# Altium PCB robot.pcbdoc (part 1 of 2)
Units mm, origin at the board's own origin, x right, y up, seen from the top; angles counter-clockwise.
Board outline 179.4 x 108.65 mm, 2 copper layers (Top Layer, Bottom Layer); 255 components, 246 nets, 775 pads, 189 vias.
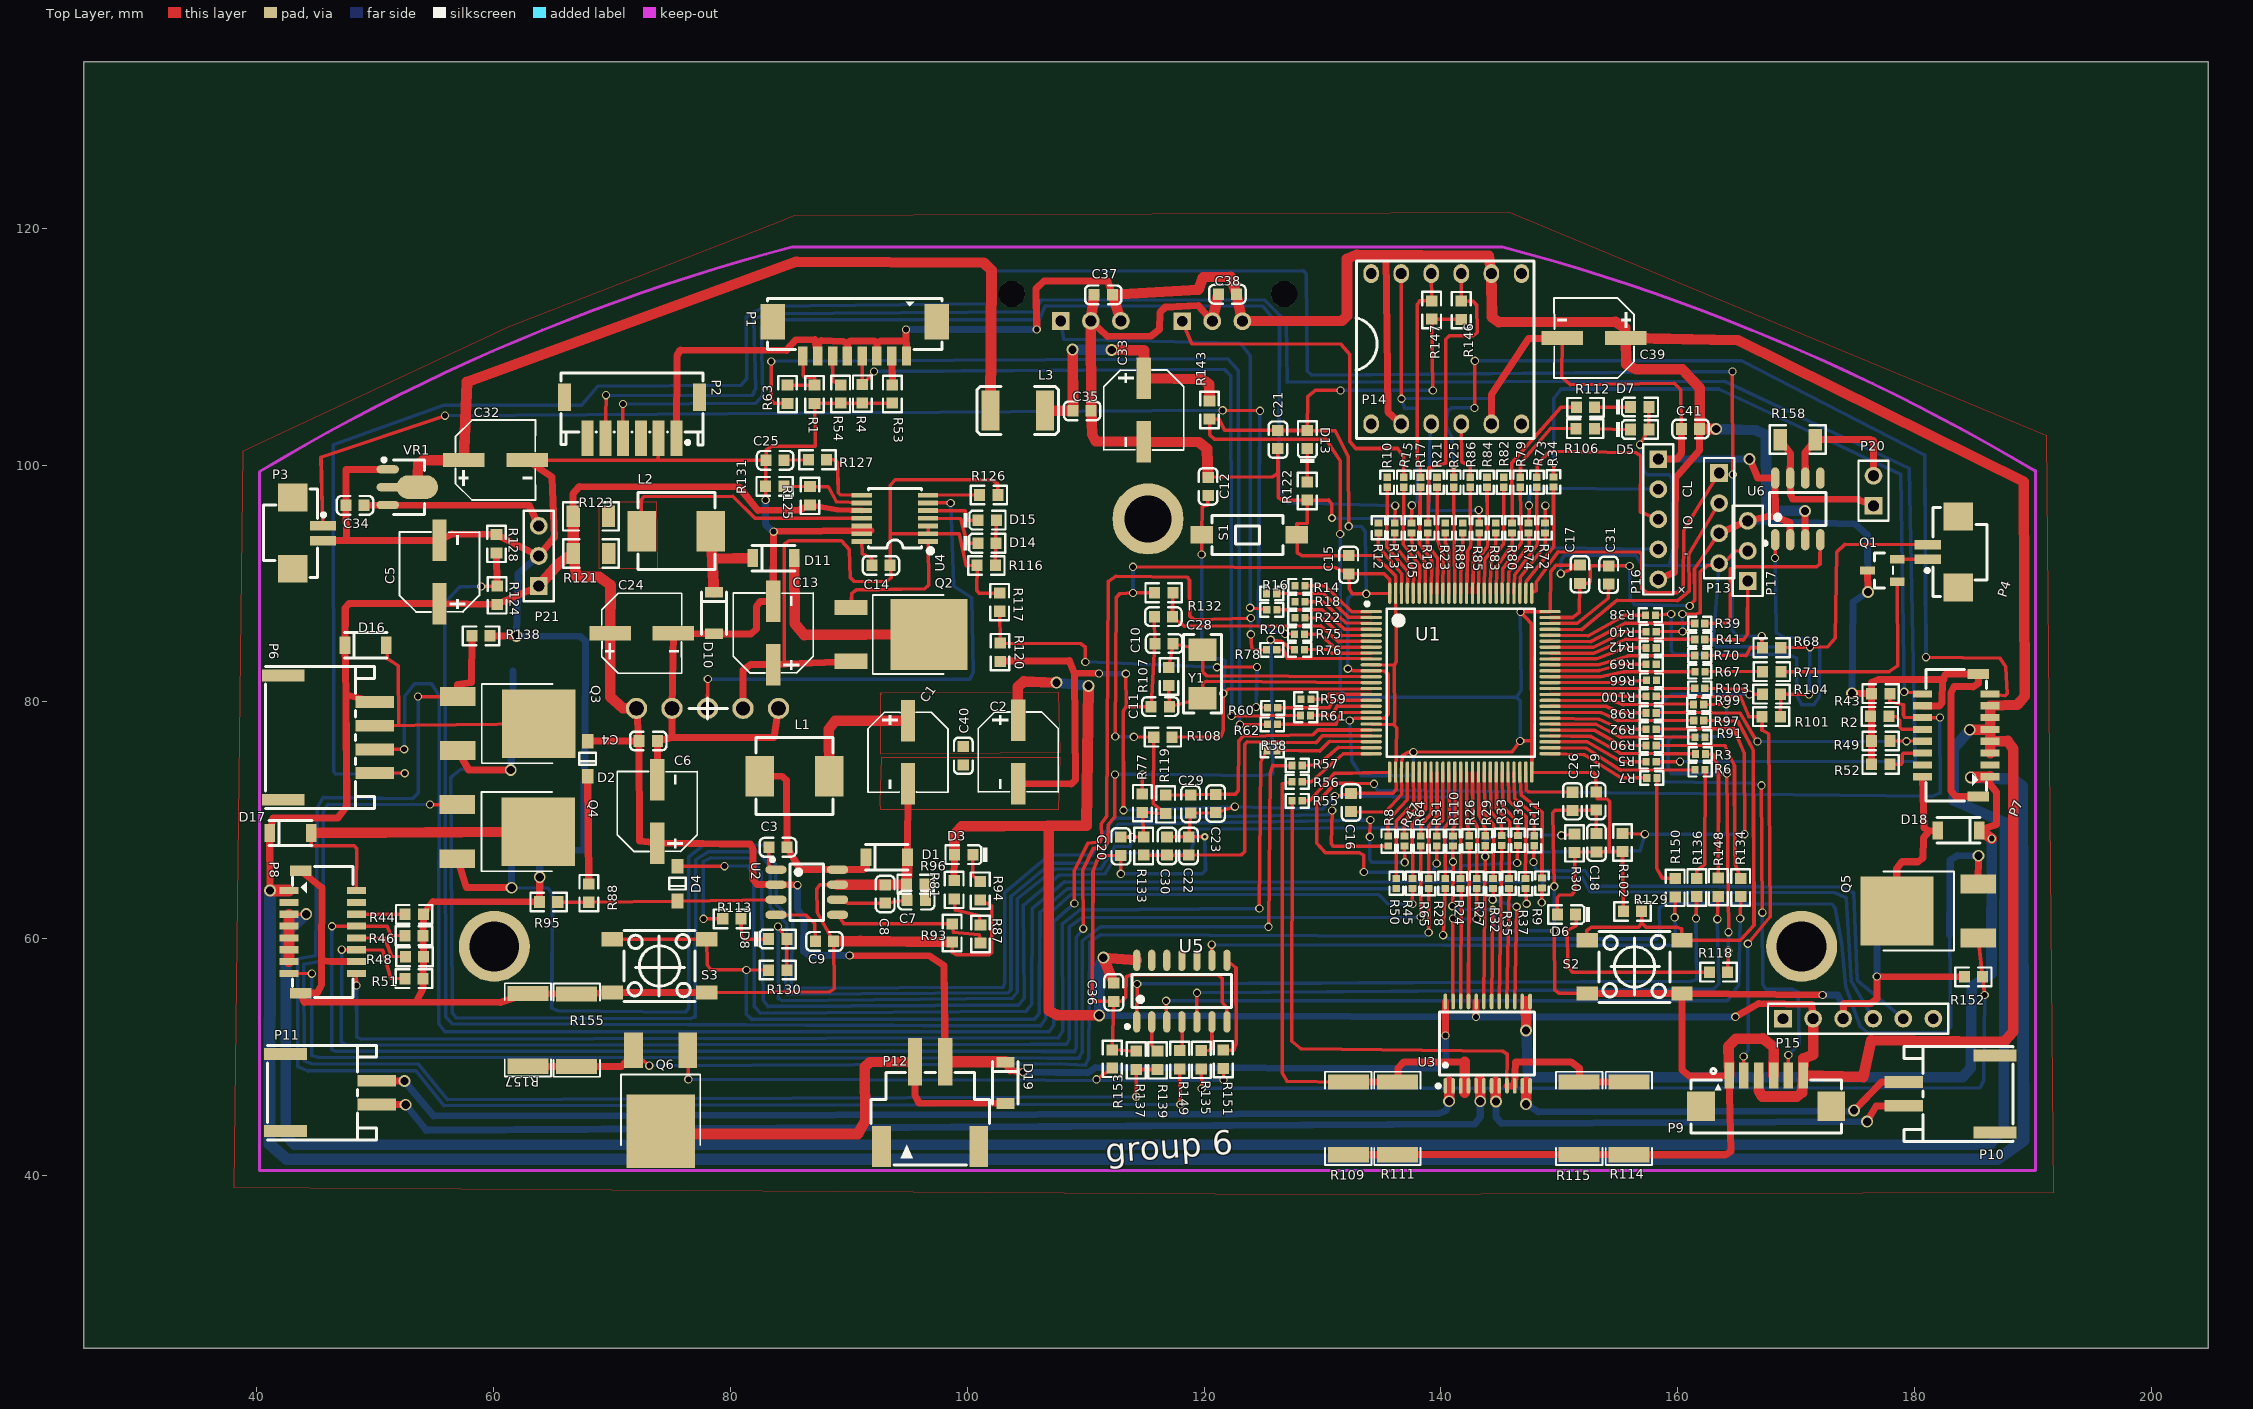
[diagram p0: Top Layer view]
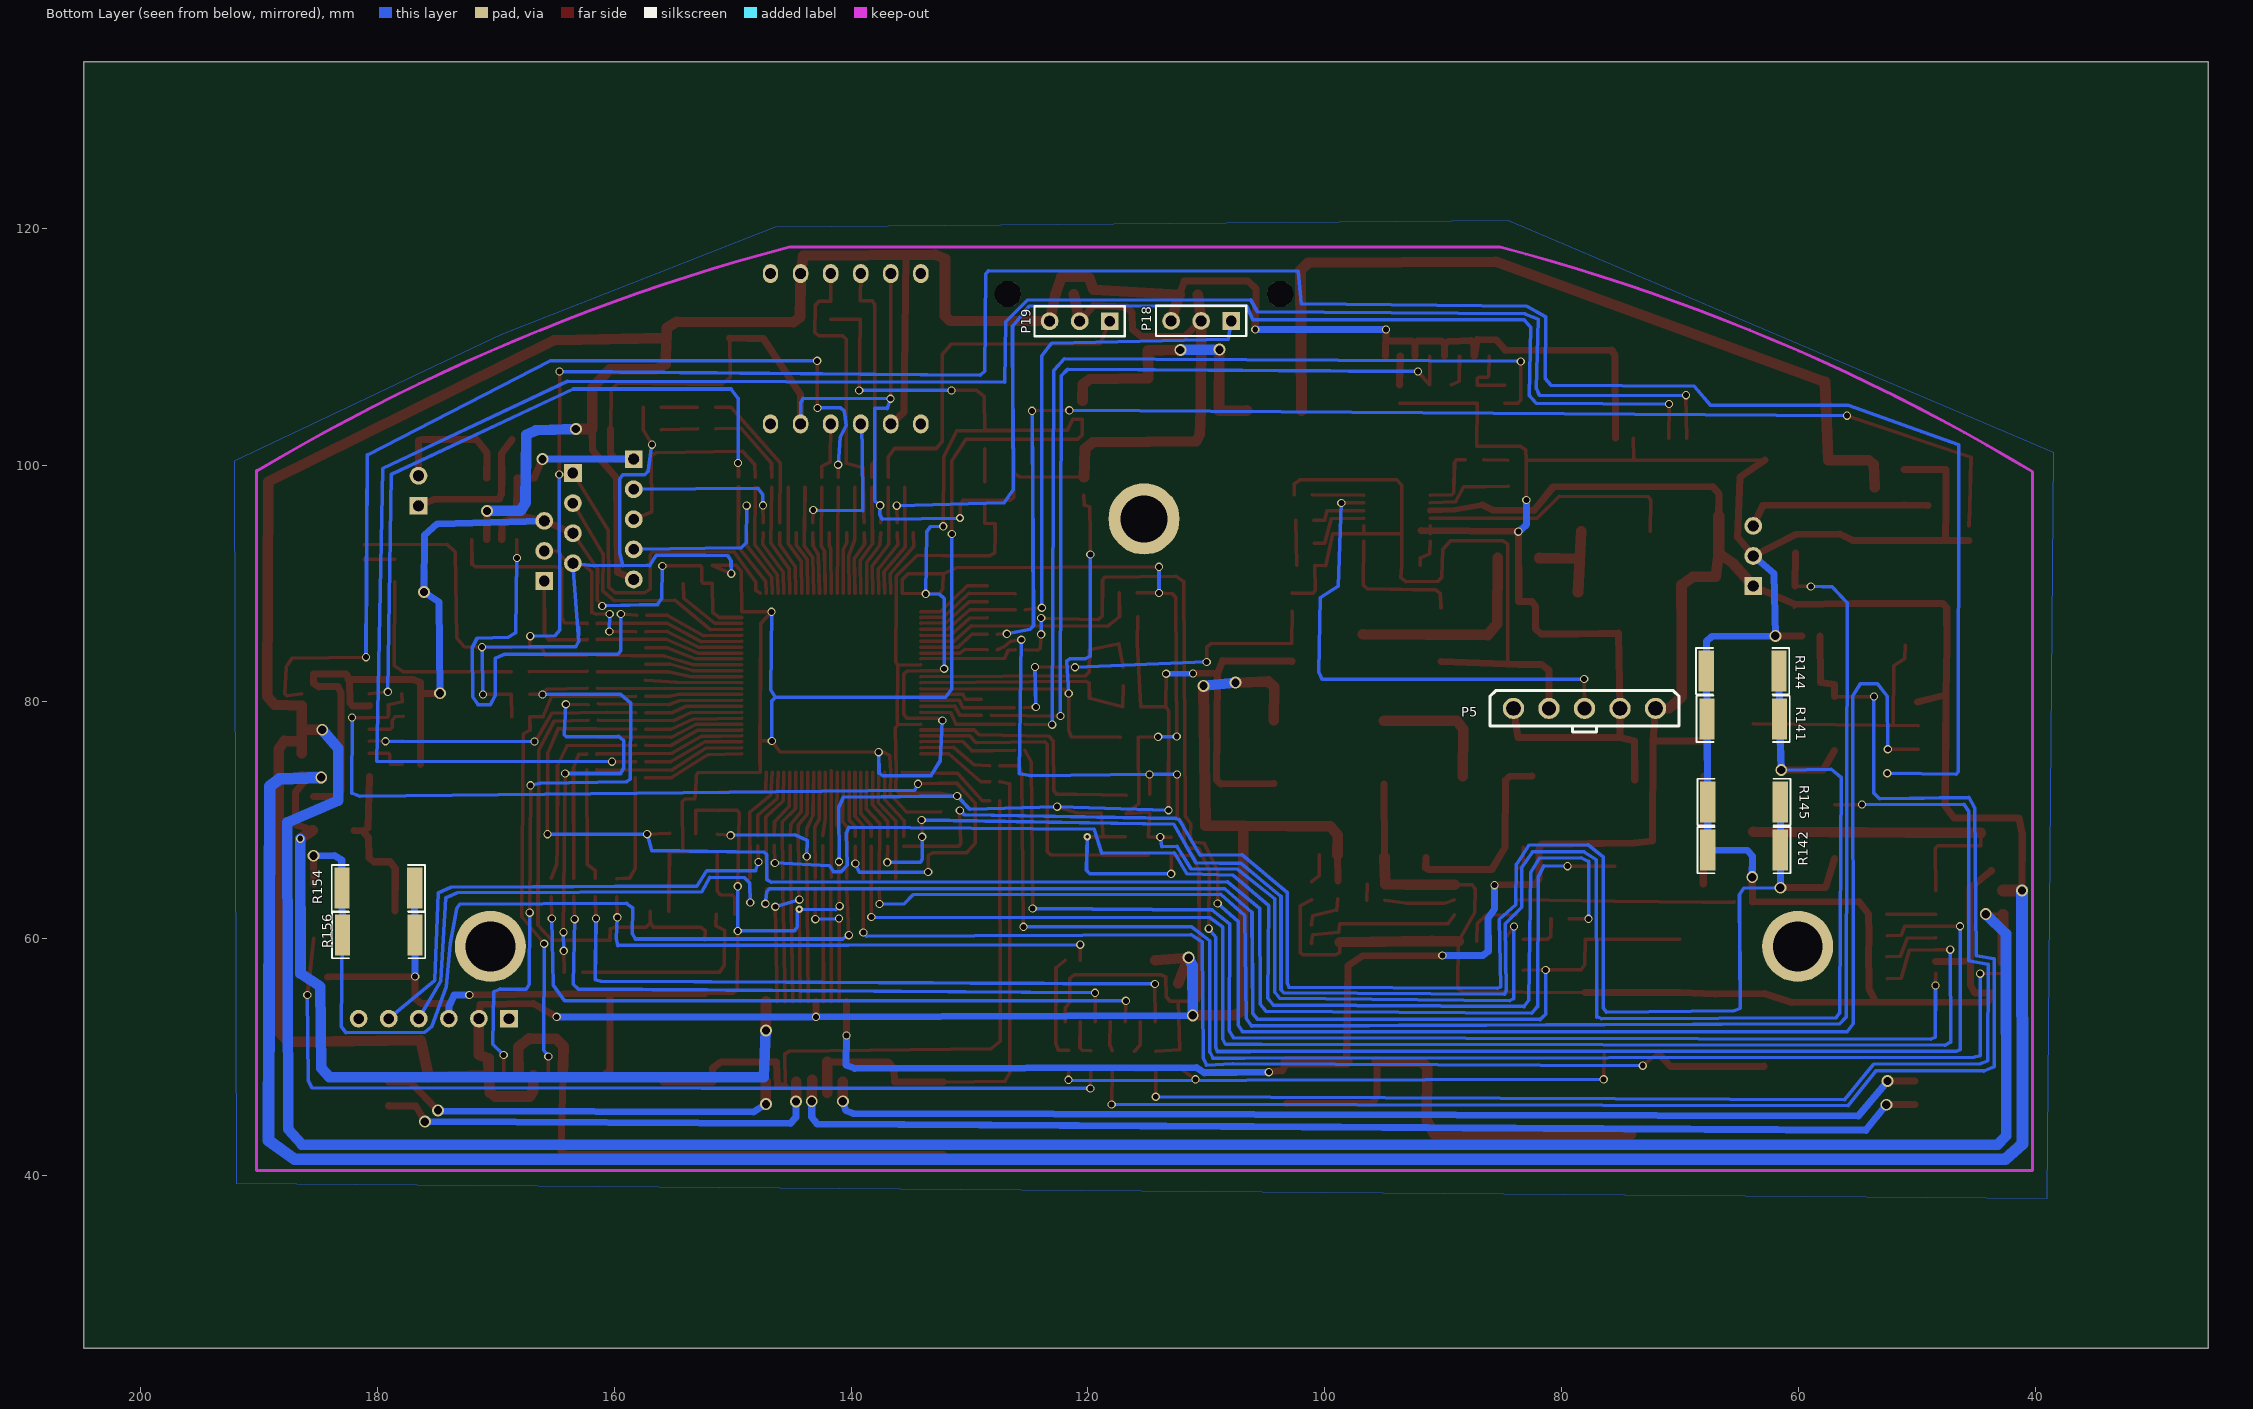
[diagram p1: Bottom Layer view, seen from below]

## Layer stack, top to bottom
Top Layer: signal copper (thickness not stored)
Dielectric: dielectric 0.32, FR-4, Dk 4.8
Bottom Layer: signal copper (thickness not stored)

## Board outline
204.8,25.4 25.4,25.4 25.4,134.05 204.8,134.05

## Components (designator, comment, footprint, x,y, rotation, side; value= is the part's Value field where it differs from the comment)
C1 "100uF" SMD6358 94.975,75.725 r270 top
C2 "100uF" SMD6358 104.291,75.747 r270 top
C3 "100nF (104) 10% 50V" 0603_C 84.019,67.72 r0 top
C4 "10nF (103) 10% 50V" 0603_C 73.067,76.698 r180 top
C5 "100uF" SMD6358 55.45,91 r90 top
C6 "100uF" SMD6358 73.842,70.773 r90 top
C7 "C" 0603_C 95.7,63.25 r180 top
C8 "39pF" 0603_C 93.075,63.775 r270 top
C9 "10nF (103) 10% 50V" 0603_C 87.944,59.77 r180 top
C10 "22pF 50V" 0603_C 116.625,84.925 r0 top
C11 "22pF 50V" 0603_C 116.3,79.6 r0 top
C12 "100nF (104) 10% 50V" 0603_C 120.342,98.198 r270 top
C13 "100uF" SMD6358 83.641,85.848 r90 top
C14 "100nF (104) 10% 50V" 0603_C 92.717,91.523 r0 top
C15 "100nF (104) 10% 50V" 0603_C 132.217,91.573 r270 top
C16 "100nF (104) 10% 50V" 0603_C 132.417,71.498 r270 top
C17 "100nF (104) 10% 50V" 0603_C 151.75,90.775 r90 top
C18 "100nF (104) 10% 50V" 0603_C 153.142,68.098 r270 top
C19 "100nF (104) 10% 50V" 0603_C 153.117,71.623 r90 top
C20 "100nF (104) 10% 50V" 0603_C 112.975,67.8 r90 top
C21 "100nF (104) 10% 50V" 0603_C 126.242,102.148 r90 top
C22 "10uF (106) 10% 10V" 0603_C 118.875,71.375 r90 top
C23 "100nF (104) 10% 50V" 0603_C 120.981,71.42 r90 top
C24 "100uF" SMD6358 72.541,85.772 r0 top
C25 "330nF (334) 10% 25V" 0603_C 83.775,100.4 r0 top
C26 "2.2uF  10% 10V" 0603_C 151.117,71.598 r90 top
C28 "100nF (104) 10% 50V" 0603_C 116.57,87.193 r0 top
C29 "10uF (106) 10% 10V" 0603_C 118.7,67.825 r270 top
C30 "100nF (104) 10% 50V" 0603_C 116.875,67.825 r270 top
C31 "2.2uF 10% 10V" 0603_C 154.175,90.725 r270 top
C32 "100uF" SMD6358 60.182,100.401 r0 top
C33 "100uF" SMD6358 114.891,104.623 r270 top
C34 "10nF (103) 10% 50V" 0603_C 48.3,96.6 r0 top
C35 "10nF (103) 10% 50V" 0603_C 109.7,104.575 r180 top
C36 "100nF (104) 10% 50V" 0603_C 112.375,55.475 r90 top
C37 "100nF (104) 10% 50V" 0603_C 111.49,114.371 r0 top
C38 "100nF (104) 10% 50V" 0603_C 121.975,114.425 r0 top
C39 "100uF" SMD6358 152.917,110.747 r180 top
C40 "100nF (104) 10% 50V" 0603_C 99.675,75.45 r90 top
C41 "100nF (104) 10% 50V" 0603_C 161.092,103.048 r0 top
D1 "B340A" LL-34 93.202,66.873 r0 top
D2 "B5819W  SL" SOD-123 67.95,75.2 r90 top
D3 "红灯 0603" 0603_LED_S1 99.7,67.1 r180 top
D4 "B5819W  SL" SOD-123 75.525,64.65 r90 top
D5 "绿灯 0603" 0603_LED_S1 156.8,103 r0 top
D6 "绿灯 0603" 0603_LED_S1 150.606,62.047 r180 top
D7 "绿灯 0603" 0603_LED_S1 156.8,104.9 r0 top
D8 "绿灯 0603" 0603_LED_S1 83.994,59.97 r0 top
D10 "B340A" LL-34 78.617,87.498 r270 top
D11 "B340A" LL-34 83.642,92.148 r0 top
D13 "红灯 0603" 0603_LED_S1 128.725,102.15 r90 top
D14 "红灯 0603" 0603_LED_S1 101.667,93.398 r0 top
D15 "绿灯 0603" 0603_LED_S1 101.697,95.348 r0 top
D16 "B340A" LL-34 49.2,84.775 r0 top
D17 "B340A" LL-34 42.85,68.925 r0 top
D18 "B340A" LL-34 183.717,69.148 r180 top
D19 "B340A" LL-34 103.225,47.825 r270 top
L1 "IHLP2525CZER100M01" IND-SMD 85.45,73.775 r0 top
L2 "IHLP2525CZER100M01" IND-SMD 75.392,94.373 r180 top
L3 "NLFC453232T-101K-PF" H-SMD-1836 104.45,104.625 r0 top
P1 "AFC12-S08DCC-00" CONN-SMD-8P-1.25 90.916,111.577 r180 top
P2 "ZH-6PWB" CONN-SMD-6P-1.5 71.55,105.075 r180 top
P3 "UK-1.25-2AWT" CONN-SMD-2P-1.25 43.225,94.25 r270 top
P4 "UK-1.25-2AWT" CONN-SMD-2P-1.25 183.492,92.648 r90 top
P5 "Header 5" IP3-5 78.067,79.448 r180 bottom
P6 "UK-2.0-4AWT" CONN-SMD_4P-P2.00_USAKRO_UK-2.0-4AWT 44.75,77.275 r270 top
P7 "A1001WR-S-2X08PD01" CONN-SMD_A1001WR-S-2X08PD01 183.636,77.161 r90 top
P8 "A1001WR-S-2X08PD01" CONN-SMD_A1001WR-S-2X08PD01 45.475,60.575 r270 top
P9 "UK-1.25-6AWT" CONN-SMD-6P-1.25 167.892,45.648 r0 top
P10 "UK-2.0-2AWT" CONN-SMD_2P-P2.00_USAKRO_UK-2.0-2AWT 183.525,46.825 r90 top
P11 "UK-2.0-2AWT" CONN-SMD_2P-P2.00_USAKRO_UK-2.0-2AWT 45.704,47.061 r270 top
P12 "HC-XH-2AWT" CONN-2.54-2PWT 97.075,44.75 r0 top
P13 "Header 4" HDR1X4 163.5,99.325 r270 top
P14 "JY901S" DIP254-127 134.112,103.473 r0 top
P15 "Header 6" HDR1X6 168.897,53.248 r0 top
P16 "Header 5" HDR1X5 158.367,100.498 r270 top
P17 "IR1" HDR1X3#1 165.917,90.208 r90 top
P18 "IR2" HDR1X3#2 107.902,112.173 r180 bottom
P19 "IR1" HDR1X3#2 118.162,112.148 r180 bottom
P20 "Header 2" HDR1X2 176.542,96.558 r90 top
P21 "LM7805" HDR1X3#3 63.817,89.783 r90 top
Q1 "SS8550 Y2" SOT-23(SOT-23-3) 177.292,91.098 r0 top
Q2 "NCE60P25" PMOS-SO-252 92.117,85.648 r0 top
Q3 "NCE6020AK" NMOS-T252-2 56.967,80.448 r0 top
Q4 "NCE6020AK" NMOS-T252-2 56.942,71.323 r0 top
Q5 "NCE6020AK" NMOS-T252-2 185.375,60.05 r180 top
Q6 "NCE6020AK" NMOS-T252-2 76.4,50.575 r270 top
R1 "1K ±1%" 0603_R 87.106,105.989 r270 top
R2 "51Ω (51R0) ±1%" 0603_R 177.075,78.775 r180 top
R3 "0Ω (0R0) ±1%" 0402_R 161.917,75.598 r0 top
R4 "1K ±1%" 0603_R 91.15,106.025 r270 top
R5 "0Ω (0R0) ±1%" 0402_R 157.767,74.95 r0 top
R6 "0Ω (0R0) ±1%" 0402_R 161.892,74.273 r0 top
R7 "0Ω (0R0) ±1%" 0402_R 157.817,73.578 r0 top
R8 "1K ±1%" 0402_R 135.561,68.248 r270 top
R9 "0Ω (0R0) ±1%" 0402_R 148.542,64.698 r270 top
R10 "0Ω (0R0) ±1%" 0402_R 135.467,98.548 r90 top
R11 "0Ω (0R0) ±1%" 0402_R 147.892,68.273 r270 top
R12 "0Ω (0R0) ±1%" 0402_R 134.742,94.698 r90 top
R13 "0Ω (0R0) ±1%" 0402_R 136.1,94.689 r90 top
R14 "0Ω (0R0) ±1%" 0402_R 128.092,89.798 r180 top
R15 "0Ω (0R0) ±1%" 0402_R 136.872,98.548 r90 top
R16 "0Ω (0R0) ±1%" 0402_R 125.717,89.148 r180 top
R17 "0Ω (0R0) ±1%" 0402_R 138.277,98.548 r90 top
R18 "0Ω (0R0) ±1%" 0402_R 128.092,88.448 r180 top
R19 "0Ω (0R0) ±1%" 0402_R 138.892,94.689 r90 top
R20 "0Ω (0R0) ±1%" 0402_R 125.725,87.775 r180 top
R21 "0Ω (0R0) ±1%" 0402_R 139.682,98.548 r90 top
R22 "0Ω (0R0) ±1%" 0402_R 128.092,87.098 r180 top
R23 "0Ω (0R0) ±1%" 0402_R 140.367,94.689 r90 top
R24 "0Ω (0R0) ±1%" 0402_R 141.667,64.648 r270 top
R25 "0Ω (0R0) ±1%" 0402_R 141.087,98.548 r90 top
R26 "0Ω (0R0) ±1%" 0402_R 142.389,68.273 r270 top
R27 "0Ω (0R0) ±1%" 0402_R 143.041,64.673 r270 top
R28 "1K ±1%" 0402_R 140.37,64.673 r270 top
R29 "0Ω (0R0) ±1%" 0402_R 143.755,68.273 r270 top
R30 "100KΩ (1003) ±1%" 0603_R 151.292,68.053 r270 top
R31 "1K ±1%" 0402_R 139.658,68.248 r270 top
R32 "0Ω (0R0) ±1%" 0402_R 144.411,64.648 r270 top
R33 "0Ω (0R0) ±1%" 0402_R 145.136,68.298 r270 top
R34 "0Ω (0R0) ±1%" 0402_R 149.517,98.573 r90 top
R35 "0Ω (0R0) ±1%" 0402_R 145.761,64.673 r270 top
R36 "0Ω (0R0) ±1%" 0402_R 146.514,68.298 r270 top
R37 "0Ω (0R0) ±1%" 0402_R 147.142,64.648 r270 top
R38 "0Ω (0R0) ±1%" 0402_R 157.7,87.325 r0 top
R39 "0Ω (0R0) ±1%" 0402_R 161.867,86.62 r0 top
R40 "0Ω (0R0) ±1%" 0402_R 157.767,85.93 r0 top
R41 "0Ω (0R0) ±1%" 0402_R 161.867,85.27 r0 top
R42 "0Ω (0R0) ±1%" 0402_R 157.767,84.558 r0 top
R43 "5.1K ±1%" 0603_R 177.15,80.7 r0 top
R44 "51Ω (51R0) ±1%" 0603_R 53.3,62.05 r0 top
R45 "1K ±1%" 0402_R 137.614,64.673 r270 top
R46 "1K ±1%" 0603_R 53.275,60.25 r0 top
R47 "1K ±1%" 0402_R 136.927,68.248 r270 top
R48 "51Ω (51R0) ±1%" 0603_R 53.325,58.475 r180 top
R49 "1K ±1%" 0603_R 177.15,76.7 r0 top
R50 "0Ω (0R0) ±1%" 0402_R 136.236,64.673 r270 top
R51 "5.1K ±1%" 0603_R 53.275,56.625 r0 top
R52 "51Ω (51R0) ±1%" 0603_R 177.15,74.725 r0 top
R53 "51Ω (51R0) ±1%" 0603_R 93.675,106 r270 top
R54 "51Ω (51R0) ±1%" 0603_R 89.317,105.998 r270 top
R55 "1K ±1%" 0402_R 127.867,71.648 r180 top
R56 "1K ±1%" 0402_R 127.867,73.248 r180 top
R57 "0Ω (0R0) ±1%" 0402_R 127.867,74.623 r180 top
R58 "0Ω (0R0) ±1%" 0402_R 125.75,75.9 r180 top
R59 "0Ω (0R0) ±1%" 0402_R 128.608,80.227 r180 top
R60 "1K ±1%" 0402_R 125.8,79.5 r180 top
R61 "1K±1%" 0402_R 128.583,78.852 r180 top
R62 "0Ω (0R0) ±1%" 0402_R 125.775,78.1 r180 top
R63 "1KΩ  ±1%" 0603_R 84.82,105.989 r90 top
R64 "1K ±1%" 0402_R 138.292,68.248 r270 top
R65 "1K ±1%" 0402_R 138.967,64.648 r270 top
R66 "0Ω (0R0) ±1%" 0402_R 157.792,81.823 r0 top
R67 "0Ω (0R0) ±1%" 0402_R 161.875,82.55 r0 top
R68 "100KΩ (1003) ±1%" 0603_R 167.937,84.573 r0 top
R69 "0Ω (0R0) ±1%" 0402_R 157.767,83.185 r0 top
R70 "0Ω (0R0) ±1%" 0402_R 161.867,83.92 r0 top
R71 "1K ±1%" 0603_R 167.95,82.55 r0 top
R72 "0Ω (0R0) ±1%" 0402_R 148.8,94.689 r90 top
R73 "0Ω (0R0) ±1%" 0402_R 148.112,98.548 r90 top
R74 "0Ω (0R0) ±1%" 0402_R 147.408,94.689 r90 top
R75 "0Ω (0R0) ±1%" 0402_R 128.067,85.723 r180 top
R76 "0Ω (0R0) ±1%" 0402_R 128.067,84.398 r180 top
R77 "100KΩ (1003) ±1%" 0603_R 114.792,71.445 r270 top
R78 "0Ω (0R0) ±1%" 0402_R 125.714,84.399 r180 top
R79 "0Ω (0R0) ±1%" 0402_R 146.707,98.548 r90 top
R80 "0Ω (0R0) ±1%" 0402_R 146.017,94.689 r90 top
R81 "0Ω (0R0) ±1%" 0603_R 98.9,64.125 r90 top
R82 "0Ω (0R0) ±1%" 0402_R 145.302,98.548 r90 top
R83 "0Ω (0R0) ±1%" 0402_R 144.625,94.689 r90 top
R84 "0Ω (0R0) ±1%" 0402_R 143.897,98.548 r90 top
R85 "0Ω (0R0) ±1%" 0402_R 143.233,94.689 r90 top
R86 "0Ω (0R0) ±1%" 0402_R 142.492,98.548 r90 top
R87 "10.2KΩ (1002) ±1%" 0603_R 101.125,60.4 r90 top
R88 "330KΩ  ±1%" 0603_R 68.042,63.848 r90 top
R89 "0Ω (0R0) ±1%" 0402_R 141.842,94.689 r90 top
R90 "0Ω (0R0) ±1%" 0402_R 157.767,76.323 r0 top
R91 "0Ω (0R0) ±1%" 0402_R 161.875,77.025 r0 top
R92 "0Ω (0R0) ±1%" 0402_R 157.767,77.695 r0 top
R93 "1.91KΩ (1002) ±1%" 0603_R 98.725,60.475 r90 top
R94 "10KΩ (1002) ±1%" 0603_R 101.1,64.05 r90 top
R95 "68KΩ" 0603_R 64.65,63.1 r0 top
R96 "50KΩ (1002) ±1%" 0603_R 95.65,64.6 r0 top
R97 "0Ω (0R0) ±1%" 0402_R 161.782,78.435 r0 top
R98 "0Ω (0R0) ±1%" 0402_R 157.767,79.068 r0 top
R99 "0Ω (0R0) ±1%" 0402_R 161.775,79.775 r0 top
R100 "0Ω (0R0) ±1%" 0402_R 157.767,80.473 r0 top
R101 "100KΩ (1003) ±1%" 0603_R 167.9,78.75 r0 top
R102 "31KΩ ±1%" 0603_R 155.342,68.123 r90 top
R103 "0Ω (0R0) ±1%" 0402_R 161.867,81.148 r0 top
R104 "100KΩ (1003) ±1%" 0603_R 167.925,80.65 r0 top
R105 "10KΩ (1002) ±1%" 0402_R 137.517,94.689 r270 top
R106 "5.1KΩ ±1%" 0603_R 152.192,103.073 r0 top
R107 "1MΩ (1004) ±1%" 0603_R 117.037,82.143 r90 top
R108 "10KΩ (1002) ±1%" 0603_R 116.525,77.025 r180 top
R109 "0.1Ω (R100) ±1%" R2512#1 132.031,44.917 r90 top
R110 "10KΩ (1002) ±1%" 0402_R 141.023,68.248 r90 top
R111 "0.1Ω (R100) ±1%" R2512#1 136.181,44.917 r90 top
R112 "5.1KΩ  ±1%" 0603_R 152.217,104.878 r0 top
R113 "2KΩ (2002) ±1%" 0603_R 80.125,61.675 r0 top
R114 "0.1Ω (R100) ±1%" R2512#1 155.731,44.917 r90 top
R115 "0.1Ω (R100) ±1%" R2512#1 151.531,44.928 r90 top
R116 "4.7KΩ (4701) ±1%" 0603_R 101.617,91.523 r180 top
R117 "20K" 0603_R 102.742,88.423 r270 top
R118 "2KΩ (2002) ±1%" 0603_R 163.45,57.175 r180 top
R119 "1Ω  ±1%" 0603_R 116.756,71.345 r270 top
R120 "3K" 0603_R 102.775,84.2 r270 top
R121 "0.4Ω (1000) ±1%" 1206_R 68.225,92.525 r180 top
R122 "5.1KΩ ±1%" 0603_R 128.717,97.803 r90 top
R123 "0.4Ω (1000) ±1%" 1206_R 68.216,95.672 r180 top
R124 "20k" 0603_R 60.3,89 r270 top
R125 "120Ω (1200) ±1%" 0603_R 86.725,97.4 r90 top
R126 "120Ω (1200) ±1%" 0603_R 101.825,97.475 r180 top
R127 "120Ω (1200) ±1%" 0603_R 87.35,100.45 r0 top
R128 "3K" 0603_R 60.25,93.35 r270 top
R129 "10KΩ (1002) ±1%" 0603_R 156.194,62.301 r180 top
R130 "10KΩ (1002) ±1%" 0603_R 84,57.35 r0 top
R131 "39.3K ±1%" 0603_R 83.742,98.198 r180 top
R132 "10Ω  ±1%" 0603_R 116.59,89.218 r180 top
R133 "1Ω  ±1%" 0603_R 114.9,67.825 r90 top
R134 "1KΩ (1001) ±1%" 0603_R 165.317,64.323 r270 top
R135 "1KΩ (1001) ±1%" 0603_R 117.95,49.775 r270 top
R136 "1KΩ (1001) ±1%" 0603_R 161.617,64.323 r270 top
R137 "1KΩ (1001) ±1%" 0603_R 116.075,49.725 r270 top
R138 "100KΩ (1003) ±1%" 0603_R 58.942,85.573 r180 top
R139 "100KΩ (1003) ±1%" 0603_R 114.275,49.725 r270 top
R141 "0.1Ω (R100) ±1%" R2512#2 64.567,78.723 r0 bottom
R142 "0.1Ω (R100) ±1%" R2512#2 64.5,67.635 r0 bottom
R143 "0Ω (0R0) ±1%" 0603_R 120.467,104.648 r90 top
R144 "0.1Ω (R100) ±1%" R2512#2 64.617,82.748 r0 bottom
R145 "0.1Ω (R100) ±1%" R2512#2 64.5,71.699 r0 bottom
R146 "10KΩ (1002) ±1%" 0603_R 141.725,113.075 r270 top
R147 "10KΩ (1002) ±1%" 0603_R 139.225,113.1 r270 top
R148 "1KΩ (1001) ±1%" 0603_R 163.442,64.348 r270 top
R149 "1KΩ (1001) ±1%" 0603_R 119.775,49.775 r270 top
R150 "1KΩ (1001) ±1%" 0603_R 159.792,64.298 r270 top
R151 "1KΩ (1001) ±1%" 0603_R 121.625,49.825 r270 top
R152 "100KΩ (1003) ±1%" 0603_R 184.975,56.775 r0 top
R153 "100KΩ (1003) ±1%" 0603_R 112.25,49.85 r270 top
R154 "0.1Ω (R100) ±1%" R2512#2 180.025,64.122 r180 bottom
R155 "0.1Ω (R100) ±1%" R2512#1 67.175,52.175 r270 top
R156 "0.1Ω (R100) ±1%" R2512#2 180,60.147 r180 bottom
R157 "0.1Ω (R100) ±1%" R2512#1 63.05,52.2 r270 top
R158 "120Ω" 1206_R 170.142,102.148 r0 top
S1 "SW-PB" SW-SMD-L1.6-W3.3 119.725,94.056 r0 top
S2 "DTSM-65Y-V-T/R" SW-SMD_4P-L6.0-W6.0-P4.50-LS8.6 156.366,57.622 r180 top
S3 "DTSM-65Y-V-T/R" SW-SMD_4P-L6.0-W6.0-P4.50-LS8.6 74.017,57.698 r180 top
U1 "STM32F407VET6" LQFP-100_14X14X05P 141.675,81.625 r0 top
U2 "TPS54331DR" SOIC-8_150MIL 86.45,63.925 r270 top
U3 "TB6612FNG" SSOP-24 143.748,51.379 r0 top
U4 "SLM6900" TSSOP145065 93.9,95.475 r90 top
U5 "74HC14D" SOIC-14_150MIL 118.125,55.575 r0 top
U6 "CAN/TJA1050T/CM" SOIC-8_150MIL 170.142,96.298 r0 top
VR1 "AMS1117-3.3" "SOT89 - DUPLICATE" 53.578,98.369 r270 top
Y1 "8MHz ±20ppm 20pF" SMD-5032_2P 119.872,82.367 r90 top

## Footprints (in the part's own frame and the unit in brackets; to place one, negate y for a bottom-side part, rotate by r counter-clockwise, add the part's x,y. Pads: shape width x height; smd on the part's side, far side on the other; paste and mask are expansions set on the pad)
0402_R [mm]
  rect 0.6x0.65 smd paste+0 mask+0.051: 1(-0.425,0) 2(0.425,0)
  silkscreen extent -0.98,-0.58 0.98,0.58
0603_C [mm]
  rect 0.93x0.98 smd paste+0 mask+0.051: 1(-0.77,0) 2(0.77,0)
  silkscreen extent -1.53,-0.79 1.53,0.79
0603_LED_S1 [mm]
  rect 0.93x0.98 smd paste+0 mask+0.051: A(0.77,0) K(-0.77,0)
  silkscreen extent -1.98,-0.79 1.54,0.79
0603_R [mm]
  rect 0.93x0.98 smd paste+0 mask+0.051: 1(-0.77,0) 2(0.77,0)
  silkscreen extent -1.53,-0.79 1.53,0.79
1206_R [mm]
  rect 1.13x1.8 smd paste+0 mask+0.051: 1(-1.49,0) 2(1.49,0)
  silkscreen extent -2.36,-1.2 2.36,1.2
CONN-2.54-2PWT [mil]
  rect 47.2x157.5 smd paste+0 mask+2: 1(-57.92,191.13) 2(42.08,191.13)
  rect 63x137.8 smd paste+0 mask+2: 3(153.48,-90.47) 4(-169.32,-90.47)
  silkscreen extent -205,-151 189,156
CONN-SMD-2P-1.25 [mm]
  rect 0.8x2.2 smd paste+0 mask+0.051: 1(-0.622,2.371) 2(0.628,2.371)
  rect 2.35x2.5 smd paste+0 mask+0.051: 3(-3.002,-0.199) 4(3.008,-0.199)
  silkscreen extent -3.75,-2.64 3.75,2.57
CONN-SMD-6P-1.5 [mm]
  rect 1x3 smd paste+0 mask+0.051: 1(-3.89,2.794) 2(-2.39,2.794) 3(-0.89,2.794) 4(0.61,2.794) 5(2.11,2.794) 6(3.61,2.794)
  rect 1.1x2.3 smd paste+0 mask+0.051: 7(5.56,-0.656) 8(-5.84,-0.656)
  silkscreen extent -6.14,-2.71 5.86,3.36
CONN-SMD-6P-1.25 [mil]
  rect 31.5x86.6 smd paste+0 mask+2: 1(-139.46,110.21) 2(-90.26,110.21) 3(-41.06,110.21) 4(8.14,110.21) 5(57.34,110.21) 6(106.54,110.21)
  rect 92.5x98.4 smd paste+0 mask+2: 7(-233.16,7.81) 8(200.24,7.81)
  silkscreen extent -266,-81 234,133
CONN-SMD-8P-1.25 [mil]
  rect 82.7x118.1 smd paste+0 mask+2: 0(-256.2,-20.88) 0(288.99,-20.88)
  rect 31.5x63 smd paste+0 mask+2: 1(-155.8,93.32) 2(-106.61,93.32) 3(-57.4,93.32) 4(-8.2,93.32) 5(40.99,93.32) 6(90.2,93.32) 7(139.39,93.32) 8(188.6,93.32)
  silkscreen extent -274,-99 306,71
CONN-SMD_2P-P2.00_USAKRO_UK-2.0-2AWT [mm]
  rect 1x3.25 smd paste+0 mask+0.051: 1(-0.937,4.445) 2(1.063,4.445)
  rect 1x3.6 smd paste+0 mask+0.051: 3(-3.187,-3.28) 4(3.313,-3.28)
  silkscreen extent -3.94,-4.78 4.06,4.42
CONN-SMD_4P-P2.00_USAKRO_UK-2.0-4AWT [mm]
  rect 1x3.25 smd paste+0 mask+0.051: 1(-2.715,5.207) 2(-0.715,5.207) 3(1.285,5.207) 4(3.285,5.207)
  rect 1x3.6 smd paste+0 mask+0.051: 5(-4.965,-2.518) 6(5.535,-2.518)
  silkscreen extent -5.72,-4.02 6.29,5.18
CONN-SMD_A1001WR-S-2X08PD01 [mil]
  rect 23.6x63 smd paste+0 mask+2: 1(-137.36,-108.49) 2(-137.36,115.9) 3(-97.95,-108.49) 4(-97.95,115.9) 5(-58.66,-108.49) 6(-58.66,115.9) 7(-19.26,-108.49) 8(-19.26,115.9) 9(20.14,-108.49) 10(20.14,115.9) 11(59.55,-108.49) 12(59.55,115.9) 13(98.84,-108.49) 14(98.84,115.9) 15(138.24,-108.49) 16(138.24,115.9)
  rect 33.5x70.9 smd paste+0 mask+2: 17(-203.26,-69.1) 18(204.14,-69.1)
  silkscreen extent -218,-97 219,104
DIP254-127 [mm]
  oval 1.3x1.6 hole 0.9 paste+0 mask+0.051: 1(0,0) 3(5.08,0) 4(7.62,0) 6(12.7,0) 7(12.7,12.7) 9(7.62,12.7) 10(5.08,12.7) 12(0,12.7)
  oval 1.3x1.6 hole 0.9 slot 0.905 at 90 deg paste+0 mask+0.051: 2(2.54,0) 5(10.16,0) 8(10.16,12.7) 11(2.54,12.7)
  silkscreen extent -1.26,-1.25 13.75,13.75
H-SMD-1836 [mm]
  rect 1.5x3.4 smd paste+0 mask+0.051: 1(-2.488,-0.016) 2(2.122,-0.016)
  silkscreen extent -3.61,-2.05 3.24,2.02
HDR1X2 [mm]
  rect 1.5x1.5 hole 0.9 slot 0.905 at 0 deg paste+0 mask+0.051: 1(0,0)
  round 1.5 hole 0.9 slot 0.905 at 0 deg paste+0 mask+0.051: 2(2.54,0)
  silkscreen extent -1.27,-1.27 3.81,1.27
HDR1X3#1 [mm]
  rect 1.5x1.5 hole 0.9 paste+0 mask+0.051: 1(0,0)
  round 1.5 hole 0.9 paste+0 mask+0.051: 2(2.54,0)
  round 1.5 hole 0.9 slot 0.905 at 0 deg paste+0 mask+0.051: 3(5.08,0)
  silkscreen extent -1.27,-1.27 6.35,1.27
HDR1X3#2 [mm]
  rect 1.5x1.5 hole 0.9 paste+0 mask+0.051: 1(0,0)
  round 1.5 hole 0.9 slot 0.905 at 0 deg paste+0 mask+0.051: 2(-2.54,0) 3(-5.08,0)
  silkscreen extent -6.35,-1.27 1.27,1.27
HDR1X3#3 [mm]
  rect 1.5x1.5 hole 0.9 slot 0.905 at 0 deg paste+0 mask+0.051: 1(0,0)
  round 1.5 hole 0.9 slot 0.905 at 0 deg paste+0 mask+0.051: 2(2.54,0) 3(5.08,0)
  silkscreen extent -1.27,-1.27 6.35,1.27
HDR1X4 [mm]
  rect 1.5x1.5 hole 0.9 paste+0 mask+0.051: 1(0,0)
  round 1.5 hole 0.9 paste+0 mask+0.051: 2(2.54,0)
  round 1.5 hole 0.9 slot 0.905 at 0 deg paste+0 mask+0.051: 3(5.08,0) 4(7.62,0)
  silkscreen extent -1.27,-1.27 8.89,1.27
HDR1X5 [mm]
  rect 1.5x1.5 hole 0.9 slot 0.905 at 0 deg paste+0 mask+0.051: 1(0,0)
  round 1.5 hole 0.9 paste+0 mask+0.051: 2(2.54,0) 3(5.08,0) 4(7.62,0)
  round 1.5 hole 0.9 slot 0.905 at 0 deg paste+0 mask+0.051: 5(10.16,0)
  silkscreen extent -1.27,-1.27 11.43,1.27
HDR1X6 [mm]
  rect 1.5x1.5 hole 0.9 paste+0 mask+0.051: 1(0,0)
  round 1.5 hole 0.9 slot 0.905 at 0 deg paste+0 mask+0.051: 2(2.54,0) 3(5.08,0)
  round 1.5 hole 0.9 paste+0 mask+0.051: 4(7.62,0) 5(10.16,0) 6(12.7,0)
  silkscreen extent -1.27,-1.27 13.97,1.27
IND-SMD [mil]
  rect 95.3x135 smd paste+0 mask+2: 1(-116.57,-1.68) 2(113.63,-1.68)
  silkscreen extent -129,-130 127,126
IP3-5 [mm]
  round 1.8 hole 1.2 slot 1.205 at 0 deg paste+0 mask+0.051: 1(6,0) 2(3,0) 5(-6,0)
  round 1.8 hole 1.2 paste+0 mask+0.051: 3(0,0) 4(-3,0)
  silkscreen extent -8,-2 8,1.5
LL-34 [mm]
  rect 0.9x1.5 smd paste+0 mask+0.051: 1(1.75,0) 2(-1.75,0)
  silkscreen extent -1.8,-1.08 1.8,1.08
LQFP-100_14X14X05P [mm]
  oval 1.8x0.28 smd paste+0 mask+0.051: 1(-7.55,6) 2(-7.55,5.5) 3(-7.55,5) 4(-7.55,4.5) 5(-7.55,4) 6(-7.55,3.5) 7(-7.55,3) 8(-7.55,2.5) 9(-7.55,2) 10(-7.55,1.5) 11(-7.55,1) 12(-7.55,0.5) 13(-7.55,0) 14(-7.55,-0.5) 15(-7.55,-1) 16(-7.55,-1.5) 17(-7.55,-2) 18(-7.55,-2.5) 19(-7.55,-3) 20(-7.55,-3.5) 21(-7.55,-4) 22(-7.55,-4.5) 23(-7.55,-5) 24(-7.55,-5.5) 25(-7.55,-6) 51(7.55,-6) 52(7.55,-5.5) 53(7.55,-5) 54(7.55,-4.5) 55(7.55,-4) 56(7.55,-3.5) 57(7.55,-3) 58(7.55,-2.5) 59(7.55,-2) 60(7.55,-1.5) 61(7.55,-1) 62(7.55,-0.5) 63(7.55,0) 64(7.55,0.5) 65(7.55,1) 66(7.55,1.5) 67(7.55,2) 68(7.55,2.5) 69(7.55,3) 70(7.55,3.5) 71(7.55,4) 72(7.55,4.5) 73(7.55,5) 74(7.55,5.5) 75(7.55,6)
  oval 0.28x1.8 smd paste+0 mask+0.051: 26(-6,-7.55) 27(-5.5,-7.55) 28(-5,-7.55) 29(-4.5,-7.55) 30(-4,-7.55) 31(-3.5,-7.55) 32(-3,-7.55) 33(-2.5,-7.55) 34(-2,-7.55) 35(-1.5,-7.55) 36(-1,-7.55) 37(-0.5,-7.55) 38(0,-7.55) 39(0.5,-7.55) 40(1,-7.55) 41(1.5,-7.55) 42(2,-7.55) 43(2.5,-7.55) 44(3,-7.55) 45(3.5,-7.55) 46(4,-7.55) 47(4.5,-7.55) 48(5,-7.55) 49(5.5,-7.55) 50(6,-7.55) 76(6,7.55) 77(5.5,7.55) 78(5,7.55) 79(4.5,7.55) 80(4,7.55) 81(3.5,7.55) 82(3,7.55) 83(2.5,7.55) 84(2,7.55) 85(1.5,7.55) 86(1,7.55) 87(0.5,7.55) 88(0,7.55) 89(-0.5,7.55) 90(-1,7.55) 91(-1.5,7.55) 92(-2,7.55) 93(-2.5,7.55) 94(-3,7.55) 95(-3.5,7.55) 96(-4,7.55) 97(-4.5,7.55) 98(-5,7.55) 99(-5.5,7.55) 100(-6,7.55)
  silkscreen extent -8.05,-6.25 6.25,6.8
NMOS-T252-2 [mil]
  rect 118.1x63 smd paste+0 mask+2: 1(0,0) 2(0,-180)
  rect 244.1x228.3 smd paste+0 mask+2: 3(269.6,-90)
  silkscreen extent 80,-222 315,42
PMOS-SO-252 [mm]
  rect 2.8x1.3 smd paste+0 mask+0.051: 1(-1.929,2.324) 3(-1.929,-2.222)
  rect 6.5x6 smd paste+0 mask+0.051: 2(4.655,0.051)
  silkscreen extent -0.09,-3.3 5.87,3.39
R2512#1 [mm]
  rect 1.283x3.456 smd paste+0 mask+0.051: 1(-3.161,-0.154) 2(2.971,-0.154)
  silkscreen extent -4.03,-2.11 3.84,1.8
R2512#2 [mm]
  rect 1.283x3.456 smd paste+0 mask+0.051: 1(3.161,0.155) 2(-2.971,0.155)
  silkscreen extent -3.84,-1.8 4.03,2.11
SMD6358 [mm]
  rect 3.5x1.2 smd paste+0 mask+0.051: 1(-2.695,0.023) 2(2.645,0.023)
  silkscreen extent -3.4,-3.35 3.35,3.4
SMD-5032_2P [mm]
  rect 1.9x2.4 smd paste+0 mask+0.051: 1(-2.05,0) 2(2.05,0)
  silkscreen extent -3.32,-1.6 3.33,1.6
SOD-123 [mm]
  rect 1.25x1 smd paste+0 mask+0.051: 1(1.475,0) 2(-1.475,0)
  silkscreen extent -0.5,-0.7 0.5,0.7
SOIC-8_150MIL [mm]
  oval 0.7x1.8 smd paste+0 mask+0.051: 1(-1.905,-2.6) 2(-0.635,-2.6) 3(0.635,-2.6) 4(1.905,-2.6) 5(1.905,2.6) 6(0.635,2.6) 7(-0.635,2.6) 8(-1.905,2.6)
  silkscreen extent -2.9,-3.05 2.4,1.4
SOIC-14_150MIL [mm]
  oval 0.6x1.8 smd paste+0 mask+0.051: 1(-3.81,-2.6) 2(-2.54,-2.6) 3(-1.27,-2.6) 4(0,-2.6) 5(1.27,-2.6) 6(2.54,-2.6) 7(3.81,-2.6) 8(3.81,2.6) 9(2.54,2.6) 10(1.27,2.6) 11(0,2.6) 12(-1.27,2.6) 13(-2.54,2.6) 14(-3.81,2.6)
  silkscreen extent -4.75,-3.15 4.2,1.4
"SOT89 - DUPLICATE" [mm]
  oval 0.7x1.9 smd paste+0 mask+0.051: 1(-1.267,-2.518) 3(1.735,-2.518)
  oval 2x3.5 smd paste+0 mask+0.051: 2(0.234,-0.018)
  oval 0.7x2.1 smd paste+0 mask+0.051: 2(0.234,-2.419)
  silkscreen extent -2.22,-2.98 2.53,0.58
SOT-23(SOT-23-3) [mm]
  rect 1.25x0.7 smd paste+0 mask+0.051: 1(1.25,-0.95) 2(1.25,0.95) 3(-1.25,0)
  silkscreen extent -0.65,-1.46 0.9,1.46
SSOP-24 [mm]
  oval 0.308x1.324 smd paste+0 mask+0.051: 1(-3.364,-3.806) 2(-2.714,-3.806) 3(-2.064,-3.806) 4(-1.414,-3.806) 5(-0.764,-3.806) 6(-0.113,-3.806) 7(0.537,-3.806) 8(1.187,-3.806) 9(1.837,-3.806) 10(2.487,-3.806) 11(3.137,-3.806) 12(3.787,-3.806) 13(3.787,3.318) 14(3.137,3.318) 15(2.487,3.318) 16(1.837,3.318) 17(1.187,3.318) 18(0.537,3.318) 19(-0.113,3.318) 20(-0.764,3.318) 21(-1.414,3.318) 22(-2.064,3.318) 23(-2.714,3.318) 24(-3.364,3.318)
  silkscreen extent -4.12,-3.96 4.15,2.42
SW-SMD-L1.6-W3.3 [mm]
  rect 1.9x1.5 smd paste+0 mask+0.051: 1(0.092,0.067) 2(8.092,0.067)
  silkscreen extent 0.95,-1.6 6.95,1.7
SW-SMD_4P-L6.0-W6.0-P4.50-LS8.6 [mil]
  rect 70.9x47.2 smd paste+0 mask+2: 1(-157.5,88.6) 2(-157.5,-88.6) 3(157.5,88.6) 4(157.5,-88.6)
  silkscreen extent -118,-118 118,118
TSSOP145065 [mm]
  rect 0.4x1.7 smd paste+0 mask+0.051: 1(-1.921,-2.798) 2(-1.271,-2.798) 3(-0.621,-2.798) 4(0.029,-2.798) 5(0.679,-2.798) 6(1.329,-2.798) 7(1.979,-2.798) 8(1.979,2.802) 9(1.329,2.802) 10(0.679,2.802) 11(0.029,2.802) 12(-0.621,2.802) 13(-1.271,2.802) 14(-1.921,2.802)
  silkscreen extent -2.92,-3.2 2.53,2.25

## Free pads (board coordinates)
  round 2.2 hole 2.2 slot 2.205 at 0 deg paste+0 mask+0.051: 0(103.767,114.448) 1(126.767,114.448)
  round 6 hole 4.2 paste+0 mask+0.051: 2(60.067,59.348) 3(170.467,59.348)
  round 6 hole 4 paste+0 mask+0.051: 4(115.267,95.448)

## Via types
v1: diameter 0.7, hole 0.5, Top Layer to Bottom Layer, tented both sides, 157 vias
v2: diameter 1, hole 0.7, Top Layer to Bottom Layer, tented both sides, 29 vias
v3: diameter 0.62, hole 0.31, Top Layer to Bottom Layer, tented both sides, 2 vias
v4: diameter 0.7, hole 0.4, Top Layer to Bottom Layer, tented both sides, 1 vias

## Nets (pads, with @x,y where several pads share a name; then routed paths per layer and width w, separated by ;. In a path a pad name is that pad's centre, name@x,y a point inside that pad or via, vN(x,y) a via of type N, cw(c..) or ccw(c..) an arc to the next point about the centre after c; other vN are vias at no path point)
ADC1: R56.2 R109.2 R111.2 U3.3 U3.4 | length 45.1
  Top Layer w0.3: R56.2@127.442,73.248 126.625,73.1 126.625,48.631 127,47.975 R109.2@132.185,47.888
  Top Layer w0.6: R109.2@132.185,47.888 R111.2@136.335,47.888 136.382,49.093 136.89,49.601 142.025,49.6
  Top Layer w0.9: 142.025,46.975 142.025,49.6
ADC2: R55.2 R114.2 R115.2 U3.9 U3.10 | length 55.1
  Top Layer w0.3: 127.399,51.335 128.191,50.702 145.228,50.498 145.6,50.275 U3.9@145.584,47.573 ; 127.399,51.335 R55.2@127.442,71.648
  Top Layer w0.6: U3.9@145.584,47.573 U3.10@146.234,47.573 146.3,49.575 151,49.575 151.7,49.075 R115.2@151.685,47.899 R114.2@155.885,47.888
ADC3: Q3.2 R47.2 R141.2 R144.2 | length 159.3
  Top Layer w0.3: v1(134,68.6) v1(134.05,70.025) ; R47.2@136.927,67.823 v1(136.95,66.45)
  Top Layer w0.6: Q3.2@56.967,75.876 57.896,74.239 v2(61.452,74.239)
  Bottom Layer w0.3: v2(61.452,74.239) 57.25,74.325 56.4,73.625 56.5,54.45 56.525,53.725 56.826,53.324 76.65,53.25 76.93,53.397 ; 77.025,53.375 77.085,66.684 78.1,67.325 82.475,67.325 83.375,65.975 83.375,62.65 84.75,61.275 84.675,55.625 84.825,55.325 103.471,55.45 103.7,55.7 103.7,63.575 107.05,66.35 110.9,66.425 112.75,69.65 v1(134.05,70.025) ; v1(134,68.6) 134,66.725 134.15,66.45 v1(136.95,66.45)
  Bottom Layer w0.6: v2(61.452,74.239) R141.2@61.595,78.568 R144.2@61.645,82.593
ADC4: Q4.2 R8.2 R142.2 R145.2 | length 135.4
  Top Layer w0.3: v1(130.825,70.825) 130.752,68.019 130.903,67.799 R8.2@135.561,67.823
  Top Layer w0.6: Q4.2@56.942,66.751 57.7,64.325 v2(61.525,64.3)
  Bottom Layer w0.3: v2(61.525,64.3) 64.625,64.25 64.975,63.725 64.9,54.125 65.45,53.9 76.225,53.8 76.475,54.125 76.475,66.9 77.8,67.95 82.75,67.9 83.825,66.275 83.875,62.875 85.25,61.65 85.15,55.925 85.45,55.8 103.025,55.9 103.175,56.25 103.175,63.9 107.025,67.1 110.525,67.05 112.3,70.05 112.575,70.15 130.425,70.45 v1(130.825,70.825)
  Bottom Layer w0.6: v2(61.525,64.3) R142.2@61.528,67.48 R145.2@61.528,71.545
ADC5: Q5.2 R28.2 R154.2 R156.2 | length 77.2
  Top Layer w0.3: v1(140.2,60.3) R28.2@140.37,64.248
  Top Layer w0.6: Q5.2@185.375,64.622 v2(185.4,67)
  Bottom Layer w0.3: v1(140.2,60.3) 140.725,59.975 158.225,59.975 158.475,60.4 158.45,62.6 158.975,62.975 173.05,62.925 173.325,62.55 173.875,59.575 174.2,55.925 175.425,52.575 176,52.1 182.675,52.05 183.075,52.6 R156.2@182.971,60.301
  Bottom Layer w0.6: R156.2@182.971,60.301 R154.2@182.996,64.276 183.025,66.625 183.625,67.025 v2(185.4,67)
ADC6: Q6.2 R65.2 R155.2 R157.2 | length 91.1
  Top Layer w0.3: Q6.2@71.828,50.35 v1(73.15,49.275) ; R65.2@138.967,64.223 v1(138.975,60.525)
  Top Layer w0.6: R157.2@62.896,49.229 R155.2@67.021,49.203 70.8,49.225 Q6.2@71.828,50.35
  Bottom Layer w0.3: v1(73.15,49.275) 107.775,49.425 110,49.325 110.275,49.9 110.35,59.725 111.3,60.35 138.725,60.225 v1(138.975,60.525)
ADC7: R45.2 R124.1 R128.2 | length 135.9
  Top Layer w0.3: v1(58.95,89.75) R124.1@60.3,89.77 ; v1(137.6,62.925) R45.2@137.614,64.248
  Top Layer w0.6: R128.2@60.25,92.58 R124.1@60.3,89.77
  Bottom Layer w0.3: v1(58.95,89.75) 57.15,89.7 55.875,88.375 55.975,53.35 56.5,52.8 106.175,52.625 106.65,53.3 106.75,61.95 108.775,63.75 134.775,63.725 135.525,62.95 v1(137.6,62.925)
ADC8: R60.2 R117.2 R120.1 | length 30.1
  Top Layer w0.3: R117.2@102.742,87.653 R120.1@102.775,84.97 109.65,84.9 109.953,84.648 v1(109.975,83.375) ; v1(121.1,82.925) v1(124.475,82.95) ; v1(124.4,79.575) R60.2@125.375,79.5
  Bottom Layer w0.3: v1(109.975,83.375) v1(121.1,82.925) ; v1(124.4,79.575) v1(124.475,82.95)
BAT-TEM-W: P5.3 U4.6 | length 42.3
  Top Layer w0.3: P5.3@78.067,79.448 v1(78.1,81.925) ; U4.6@96.698,96.804 v1(98.6,96.8)
  Bottom Layer w0.3: v1(78.1,81.925) 100.225,81.9 100.525,82.55 100.375,88.8 98.85,89.775 v1(98.6,96.8)
BATTAY: C28.2 R132.1 U1.6 | length 19.6
  Top Layer w0.3: R132.1@117.36,89.218 C28.2@117.34,87.193 118.375,86.375 129.875,86.425 131.325,85.1 U1.6@134.125,85.125
BEER: R67.2 R71.1 | length 4.9
  Top Layer w0.3: R67.2@162.292,82.571 R71.1@167.18,82.55
BLRX3: P15.5 R11.2 | length 42.2
  Top Layer w0.3: v1(147.825,66.475) R11.2@147.892,67.848
  Bottom Layer w0.3: v1(147.825,66.475) 148.075,65.725 152.2,65.725 153.025,64.45 173.8,64.35 174.857,63.884 175.177,56.481 P15.5@179.057,53.248
BLTX3: P15.4 R9.2 | length 40.2
  Top Layer w0.3: v1(148.525,63.05) R9.2@148.542,64.273
  Bottom Layer w0.3: v1(148.525,63.05) 148.575,64.7 149,65.15 151.925,65.2 152.6,63.975 173.275,63.875 174.225,63.45 174.675,56.4 P15.4@176.517,53.248
BOOT0: R105.2 U1.94 | length 5.5
  Top Layer w0.3: R105.2@137.517,94.264 137.575,93.25 138.7,91.75 U1.94@138.675,89.175
BOOT1: R110.2 U1.37 | length 5.4
  Top Layer w0.3: R110.2@141.023,68.673 141.025,69.25 141.2,69.575 U1.37@141.175,74.075
C7_1: C7.1 R96.2 | length 1.4
  Top Layer w0.3: R96.2@96.42,64.6 C7.1@96.47,63.25
C35_2: C33.1 C35.2 L3.2 R143.2 | length 23
  Top Layer w0.9: L3.2@106.572,104.609 C35.2@108.93,104.575 v2(108.9,109.75) ; v2(112.2,109.725) 114.925,109.675 C33.1@114.914,107.318 119.85,107.25 120.45,106.8 R143.2@120.467,105.418
  Bottom Layer w0.9: v2(108.9,109.75) v2(112.2,109.725)
CANRX: R39.2 U6.4 | length 16.3
  Top Layer w0.3: R39.2@162.292,86.62 164.225,86.675 164.425,87.15 164.45,91.225 164.95,91.425 171.7,91.4 172.022,91.637 U6.4@172.047,93.698
CANTX: R38.2 U6.1 | length 37.4
  Top Layer w0.3: R38.2@158.125,87.325 v1@159.45,87.425 ; v1@168.225,92.15 U6.1@168.237,93.698
  Bottom Layer w0.3: v1@159.45,87.425 159.45,84.3 159.7,84.025 169.275,84.025 170.05,83.675 170.075,80.5 170.475,79.75 171.525,79.775 171.975,80.45 172,84.6 171.575,85.375 168.975,85.45 168.325,85.85 v1(168.225,92.15)
  other v1: 159.45,87.425
CHRG-MPW-O: C13.1 C14.2 P5.4 Q2.3 R116.2 R117.1 R126.1 U4.2 U4.3 | length 67.1
  Top Layer w0.3: 84.553,83.192 84.55,93.325 85,93.625 89.375,93.6 90.05,92.85 90.125,90.5 90.475,90.175 93.175,90.15 93.575,90.5 C14.2@93.487,91.523 93.5,98.3 93.925,98.75 102.125,98.75 102.575,98.4 R126.1@102.595,97.475 ; 93.492,94.199 U4.2@96.698,94.204 ; U4.3@96.698,94.854 U4.2@96.698,94.204 ; R117.1@102.742,89.193 100.984,89.172 100.821,89.4 R116.2@100.847,91.523 99.925,91.5 99.311,94.2 U4.2@96.698,94.204
  Top Layer w0.6: P5.4@81.067,79.448 81.075,82.7 81.7,83.15 C13.1@83.618,83.153 Q2.3@90.188,83.426
CONLSWM: R6.2 R136.1 | length 9.5
  Top Layer w0.3: R136.1@161.617,65.093 161.625,65.775 162.3,66.275 R6.2@162.317,74.273
CONMM: R7.2 R150.1 | length 9.7
  Top Layer w0.3: R7.2@158.242,73.578 158.225,65.95 158.7,65.125 R150.1@159.792,65.068
CONRSWM: R3.2 R148.1 | length 11.2
  Top Layer w0.3: R3.2@162.342,75.598 163,75.575 163.45,74.425 R148.1@163.442,65.118
CONVACM: R90.2 R134.1 | length 17.3
  Top Layer w0.3: R90.2@158.192,76.323 164,76.3 164.8,74.6 164.825,67.675 164.875,66.3 R134.1@165.317,65.093
D0: P14.1
D1: P14.6
D2: P14.7
D3: P14.12
D6_K: D6.K R118.2 | length 17
  Top Layer w0.3: D6.K@151.376,62.047 151.425,61.1 150.675,60.7 150.7,57.8 151.1,57.175 R118.2@162.68,57.175
D7_K: D7.K R112.2 | length 3
  Top Layer w0.3: R112.2@152.987,104.878 D7.K@156.03,104.9
EN: P15.1
FLIR-DS-O: P1.4 R4.1 R61.2 | length 68.8
  Top Layer w0.3: P1.4@91.124,109.207 R4.1@91.15,106.795 v1(92.125,107.9) ; v1(122.325,78.8) R61.2@128.158,78.852
  Bottom Layer w0.3: v1(92.125,107.9) 121.725,108.075 122.25,107.55 v1(122.325,78.8)
FLIR-GND-H: P1.2 R53.1 | length 2.4
  Top Layer w0.6: P1.2@93.624,109.207 R53.1@93.675,106.77
FRIR-DS-BL: P1.8 R1.1 R63.2 | length 5.6
  Top Layer w0.3: R63.2@84.82,106.759 R1.1@87.106,106.759 87.125,107.325 86.95,107.425 86.225,107.425 86.15,107.6 P1.8@86.126,109.207
FRIR-GND-R: P1.6 R54.1 | length 2.9
  Top Layer w0.3: P1.6@88.625,109.207 88.65,107.075 R54.1@89.317,106.768
GND: C1.2 C2.2 C4.1 C5.2 C6.2 C8.1 C9.1 C10.1 C11.1 C12.1 C13.2 C15.1 C16.1 C17.1 C18.1 C19.1 C20.1 C21.1 C22.1 C23.1 C24.2 C25.1 C26.1 C28.1 C29.1 C30.1 C31.1 C32.2 C33.2 C34.1 C35.1 C36.1 C37.1 C38.1 C39.2 C40.1 C41.1 D1.1 D10.1 P2.2 P3.2 P5.2 P5.5 P7.14 P7.17 P7.18 P8.14 P8.17 P8.18 P9.1 P9.4 P13.3 P14.5 P14.11 P15.3 P16.1 P17.3 P18.2 P19.2 P21.2 Q1.3 R1.2 R2.2 R4.2 R43.1 R44.2 R46.2 R48.1 R49.1 R51.2 R52.1 R53.2 R54.2 R93.1 R94.1 R95.1 R96.1 R105.1 R109.1 R110.1 R111.1 R114.1 R115.1 R120.2 R122.1 R128.1 R131.2 R138.1 R139.1 R141.1 R142.1 R144.1 R145.1 R152.1 R153.1 R154.1 R155.1 R156.1 R157.1 S1.2 S2.1 S2.3 S3.1 S3.3 U1.10 U1.20 U1.27 U1.74 U1.99 U2.7 U3.18 U4.12 U4.13 U5.7 U6.2 U6.8 VR1.1 | length 865.7
  Top Layer w0.3: C32.2@62.827,100.424 73.725,100.4 ; P2.2@73.94,102.281 73.9,100.575 73.725,100.4 ; S3.1@78.017,55.447 88.364,55.503 88.753,55.758 C9.1@88.714,59.77 87.325,62.25 87.3,64.225 87.55,64.55 U2.7@89.05,64.56 ; v1(82.975,97.05) R131.2@82.972,98.198 C25.1@83.005,100.4 ; U4.13@91.098,94.204 U4.12@91.098,94.854 ; R53.2@93.675,105.23 R1.2@87.106,105.219 87.15,101.575 83.45,101.575 83.025,101.275 C25.1@83.005,100.4 ; R93.1@98.725,59.705 98.75,58.825 99.1,58.625 101.825,58.625 102.075,58.825 102.075,62.775 R94.1@101.1,63.28 ; v1(112.975,65.475) C20.1@112.975,67.03 111.1,67 110.625,65.675 110.55,55.075 110.725,54.725 C36.1@112.375,54.705 ; v1(113.2,70.85) 113.175,79.185 113.427,79.6 ; v1(113.4,82.375) 113.427,79.6 ; R139.1@114.275,50.495 R153.1@112.25,50.62 C36.1@112.375,54.705 ; C11.1@115.53,79.6 C10.1@115.855,84.925 C28.1@115.8,87.193 ; C11.1@115.53,79.6 113.427,79.6 ; C30.1@116.875,68.595 C29.1@118.7,68.595 ; v3(120.075,68.6) C29.1@118.7,68.595 ; C12.1@120.342,98.968 125.766,99.004 126.247,99.305 C21.1@126.242,101.378 126.275,97.275 126.575,97.05 R122.1@128.717,97.033 ; U5.7@121.935,52.975 121.925,54.125 121.525,54.65 121.525,56.65 121.15,56.95 113.825,56.95 113.45,56.775 113.4,55.075 113.025,54.7 C36.1@112.375,54.705 ; v1(122.6,71.15) C23.1@120.981,70.65 C22.1@118.875,70.605 C29.1@118.7,68.595 ; v4(130.8,95.525) 130.8,96.7 130.525,97.05 R122.1@128.717,97.033 ; v1(131.05,72.05) C16.1@132.417,72.268 135.95,72.275 136.225,72.6 U1.27@136.175,74.075 136.275,77.825 136.05,78.075 ; U1.20@134.125,78.125 136.05,78.075 ; U1.10@134.125,83.125 136.075,83.075 ; P14.11@136.652,116.173 v1(136.675,105.6) ; R105.1@137.517,95.114 v1(137.55,96.6) ; v1@141,62.75 v1@141.05,66.5 ; R110.1@141.023,67.823 v1(141.025,66.5) ; U3.18@144.284,54.697 v3(144.375,62.475) ; U1.74@149.225,87.125 151.125,87.125 151.7,87.55 C17.1@151.75,90.005 152.5,90 152.625,90.2 152.625,91.35 152.725,91.475 C31.1@154.175,91.495 v1(155.95,91.475) ; v1(149.575,64.425) 149.45,70.625 149.625,70.85 C26.1@151.117,70.828 C19.1@153.117,70.853 C18.1@153.142,68.868 ; v1(149.575,60.65) 149.625,55.65 149.95,55.4 S2.3@152.366,55.372 ; C39.2@150.272,110.725 150.225,107.425 150.925,106.8 159.7,106.9 160.25,106.35 C41.1@160.322,103.048 ; v1(161.025,88.1) 161.45,88.625 161.425,91.225 P13.3@163.5,94.245 ; 73.725,100.4 C25.1@83.005,100.4 ; R122.1@128.717,97.033 128.7,95.104 127.851,95.054 S1.2@127.817,94.123 127.857,92.596 128.265,92.351 C15.1@132.217,92.343 134.425,92.375 136.2,90.625 U1.99@136.175,89.175 136.225,83.4 136.075,83.075 ; 136.05,78.075 136.125,78.425 136.075,83.075
  Top Layer w0.6: P8.17@43.72,65.737 45.494,64.316 45.475,58.175 ; P3.2@45.596,93.622 C5.2@55.427,93.645 56.5,94.175 R128.1@60.25,94.12 P21.2@63.817,92.323 65.075,93.875 ; 47.565,93.627 C34.1@47.53,96.6 47.543,99.612 VR1.1@51.06,99.636 ; P8.14@48.419,58.064 46.225,58.075 45.475,58.175 ; R138.1@59.712,85.573 v2(61.95,85.575) ; C32.2@62.827,100.424 64.925,98.975 65.15,93.875 ; v2(63.9,65.2) R95.1@63.88,63.1 54.9,63.15 R44.2@54.07,62.05 R46.2@54.045,60.25 R48.1@54.095,58.475 R51.2@54.045,56.625 54.05,55.825 53.45,54.65 ; C6.2@73.819,73.418 C4.1@73.837,76.698 75.075,77 ; S3.1@78.017,55.447 S3.3@70.016,55.447 R155.1@67.021,55.336 R157.1@62.896,55.361 60.55,54.6 53.45,54.65 ; P5.5@84.067,79.448 83.675,76.975 75.075,77 ; 91.85,94.487 v1(83.65,94.375) C13.2@83.618,88.493 82.5,88.475 82.2,88.05 82.2,86.15 81.75,85.725 D10.1@78.617,85.748 C24.2@75.186,85.794 P5.2@75.067,79.448 75.075,77 ; D1.1@94.952,66.873 C1.2@94.998,73.08 ; R120.2@102.775,83.43 108.625,83.475 109.05,82.425 ; C2.2@104.314,73.102 108.775,73.05 109.15,73.4 109.05,82.425 v1(111.125,82.4) ; P18.2@110.442,112.173 111.85,110.85 115.55,110.9 116.225,111.45 116.275,112.9 116.725,113.325 119.525,113.475 P19.2@120.702,112.148 ; R109.1@132.185,41.756 R111.1@136.335,41.756 R115.1@151.685,41.767 R114.1@155.885,41.756 164.036,41.75 164.508,42.026 P9.1@164.35,48.447 160.975,48.4 160.375,48.925 S2.1@160.367,55.372 ; P14.5@144.272,103.473 144.285,105.947 147.388,110.664 C39.2@150.272,110.725 ; S2.3@152.366,55.372 S2.1@160.367,55.372 ; P16.1@158.367,100.498 159.975,100.525 160.325,101 C41.1@160.322,103.048 ; P13.3@163.5,94.245 P17.3@165.917,95.288 167.65,95.675 168.25,95.649 ; v2(166.075,100.5) 166.75,98.925 U6.8@168.237,98.898 168.25,95.649 ; U6.2@169.507,93.698 169.475,95.15 168.25,95.649 ; v1(172.25,55.25) S2.1@160.367,55.372 ; P15.3@173.977,53.248 174,54.525 176.3,54.525 176.825,54.925 v1(176.825,56.8) R152.1@184.205,56.775 ; v2(174.725,80.725) R43.1@176.38,80.7 ; Q1.3@176.042,91.098 v2(176.075,89.275) ; R52.1@176.38,74.725 R43.1@176.38,80.7 ; P7.14@180.692,79.672 182.101,79.647 182.317,79.93 182.375,81.875 182.65,82.35 P7.18@185.391,82.347 185.4,81.55 184.95,81.275 183.35,81.3 183.075,80.725 183.1,72.475 183.45,72.025 P7.17@185.391,71.999 ; 182.475,81.875 176.95,81.875 176.375,81.65 R43.1@176.38,80.7 ; 45.475,58.175 45.475,56.075 45.1,55.425 P8.18@43.72,55.389 44.025,54.625 53.45,54.65
  Top Layer w0.9: C9.1@88.714,59.77 90.975,59.8 R93.1@98.725,59.705 ; U2.7@89.05,64.56 C8.1@93.075,64.545 R96.1@94.88,64.6 D1.1@94.952,66.873 ; C37.1@110.72,114.371 P18.2@110.442,112.173 C35.1@110.47,104.575 110.55,102.6 110.85,102 C33.2@114.914,101.979 119.575,101.925 120.25,101.375 C12.1@120.342,98.968 ; P19.2@120.702,112.148 C38.1@121.205,114.425 ; P9.1@164.35,48.447 164.3,50.9 164.925,51.55 167.175,51.575 168.125,50.825 P9.4@168.099,48.447
  Bottom Layer w0.3: v1(112.975,65.475) 116.5,65.475 119.85,65.475 120.125,65.775 v3(120.075,68.6) ; v1(113.2,70.85) v1(122.6,71.15) 130,70.95 v1(131.05,72.05) 140.675,71.95 141.05,71.075 v1(141.025,66.5) ; v4(130.8,95.525) 137.375,95.425 137.6,95.825 v1(137.55,96.6) 138,96.975 138.007,104.791 136.95,104.775 v1(136.675,105.6) 144.046,105.651 144.248,105.298 P14.5@144.272,103.473 ; v1(140.975,62.75) 141.29,62.449 v3(144.375,62.475) 144.55,62.125 144.55,61.025 144.775,60.675 v1(149.575,60.65) v1(149.575,64.425) ; v1(155.95,91.475) 156,88.725 156.35,88.225 v1(161.025,88.1)
  Bottom Layer w0.5: v1(111.125,82.4) v1(113.4,82.375)
  Bottom Layer w0.6: P21.2@63.817,92.323 62.05,90.825 v2(61.95,85.575) 67.3,85.525 67.75,85.125 R144.1@67.778,82.593 R141.1@67.728,78.568 R145.1@67.661,71.545 R142.1@67.661,67.48 64.3,67.45 63.875,67 v2(63.9,65.2) ; v1(82.975,97.05) 82.95,94.975 v1(83.65,94.375) ; P16.1@158.367,100.498 v2(166.075,100.5) ; P17.3@165.917,95.288 174.95,95.025 176.05,94.075 v2(176.075,89.275) 174.8,88.45 v2(174.725,80.725) ; v1(172.25,55.25) 173.525,55.25 173.975,54.25 P15.3@173.977,53.248 ; v1(176.825,56.8) 176.825,58.075 R156.1@176.839,60.301 R154.1@176.864,64.276
IR-SG1-W: P2.4 R13.2 | length 92
  Top Layer w0.3: v1(70.925,105.15) P2.4@70.94,102.281 ; R13.2@136.1,95.114 v1(136.15,96.575)
  Bottom Layer w0.3: v1(70.925,105.15) 82.15,105.225 82.725,105.875 82.609,111.65 83.169,112.275 106.075,112.275 106.6,113.45 124.975,113.4 126.375,111.7 126.325,97.9 127.075,96.8 v1(136.15,96.575)
IR-SG2-O: P2.5 R5.2 | length 174.6
  Top Layer w0.3: P2.5@69.44,102.281 v1(69.5,105.9) ; R5.2@158.192,74.95 v1(160.2,74.95)
  Bottom Layer w0.3: v1@69.612,105.837 81.887,105.912 82.127,106.46 81.958,112.302 83.087,112.762 105.7,112.95 106.25,113.95 125.137,113.912 126.937,112.112 127.025,107 163.95,107.075 179.575,99.7 180.075,75 v1(160.2,74.95)
IRD1: P19.1 R15.2 | length 30.1
  Top Layer w0.3: P19.1@118.162,112.148 118.975,110.25 131.575,110.2 132.325,109.3 132.325,101.95 132.8,101.4 136.35,101.4 136.875,100.65 R15.2@136.872,98.973
IRD2: P18.1 R20.2 | length 40.5
  Top Layer w0.3: v1(123.9,87.95) R20.2@125.3,87.775
  Bottom Layer w0.3: P18.1@107.902,112.173 108.168,110.623 123.075,110.3 123.9,109.25 v1(123.9,87.95)
KEY0: R97.2 R129.1 S2.2 S2.4 | length 39.3
  Top Layer w0.3: S2.4@152.366,59.873 152.325,60.7 152.75,60.975 156.725,60.975 156.95,61.35 ; 156.95,61.35 157.325,60.975 159.975,60.975 160.35,60.825 S2.2@160.367,59.873 165.275,59.875 166.45,61.125 166.4,75.9 165.075,78.375 R97.2@162.207,78.435 ; 156.95,61.35 R129.1@156.964,62.301 156.95,61.35
KEY1: R37.2 R130.1 S3.2 S3.4 | length 97.1
  Top Layer w0.3: S3.4@70.016,59.948 S3.2@78.017,59.948 78.047,57.784 78.35,57.375 v1(81.347,57.36) R130.1@83.23,57.35 ; R37.2@147.142,64.223 v1(147.25,62.95)
  Bottom Layer w0.3: v1(81.347,57.36) 81.325,53.625 81.825,53.175 105.7,53.2 106.075,53.675 106.15,62.225 108.45,64.225 135.075,64.2 146.9,64.225 147.125,63.95 v1(147.25,62.95)
L2_1: D10.2 D11.2 L2.1 | length 8.6
  Top Layer w0.9: L2.1@78.352,94.416 D10.2@78.617,89.248 ; 78.47,92.091 D11.2@81.892,92.148
LED0: R79.2 R106.1 | length 7.2
  Top Layer w0.3: R79.2@146.707,98.973 146.727,100.158 149.275,103.1 R106.1@151.422,103.073
LED1: R80.2 R112.1 | length 12.7
  Top Layer w0.3: R80.2@146.017,95.114 145.977,100.159 150.15,104.9 R112.1@151.447,104.878
LED2: R36.2 R113.1 | length 103.5
  Top Layer w0.3: v1(77.725,61.675) R113.1@79.355,61.675 ; v1(146.45,66.4) R36.2@146.514,67.873
  Bottom Layer w0.3: v1(77.725,61.675) 77.725,66.525 78.325,66.825 81.875,66.8 82.6,65.625 82.775,54.8 83.175,54.275 104.35,54.4 104.825,55 104.75,62.8 107.775,65.375 111.625,65.475 112.7,67.25 118.85,67.225 119.475,69.225 140.2,69.4 140.4,68.925 140.325,66.2 140.85,65.65 141.5,65.675 141.85,66.175 v1(146.45,66.4)
LED3: R99.2 R118.1 | length 34
  Top Layer w0.3: R99.2@162.2,79.775 v1(164.1,79.8) ; v1(164.15,73.95) v1(164.3,60.55) ; R118.1@164.22,57.175 v1(164.275,58.975)
  Bottom Layer w0.3: v1(164.1,79.8) 164.225,77.225 164.05,77.05 159.65,77.075 159.2,76.725 159.2,74.425 159.475,73.95 v1(164.15,73.95) ; v1(164.275,58.975) v1(164.3,60.55)
LIR-DS-BL: P8.12 R51.1 R64.2 | length 122.1
  Top Layer w0.3: v1(47.175,59.075) P8.12@48.419,59.062 50.625,59.025 51.3,56.65 R51.1@52.505,56.625 ; R64.2@138.292,67.823 v1(138.3,61.825)
  Bottom Layer w0.3: v1(47.175,59.075) 47.15,51.275 47.625,51 105.35,51.075 108.375,51.075 108.6,51.5 108.625,60.975 109.725,61.775 v1(138.3,61.825)